# EAGLE board Alimentation (EAGLE 9.5.0)
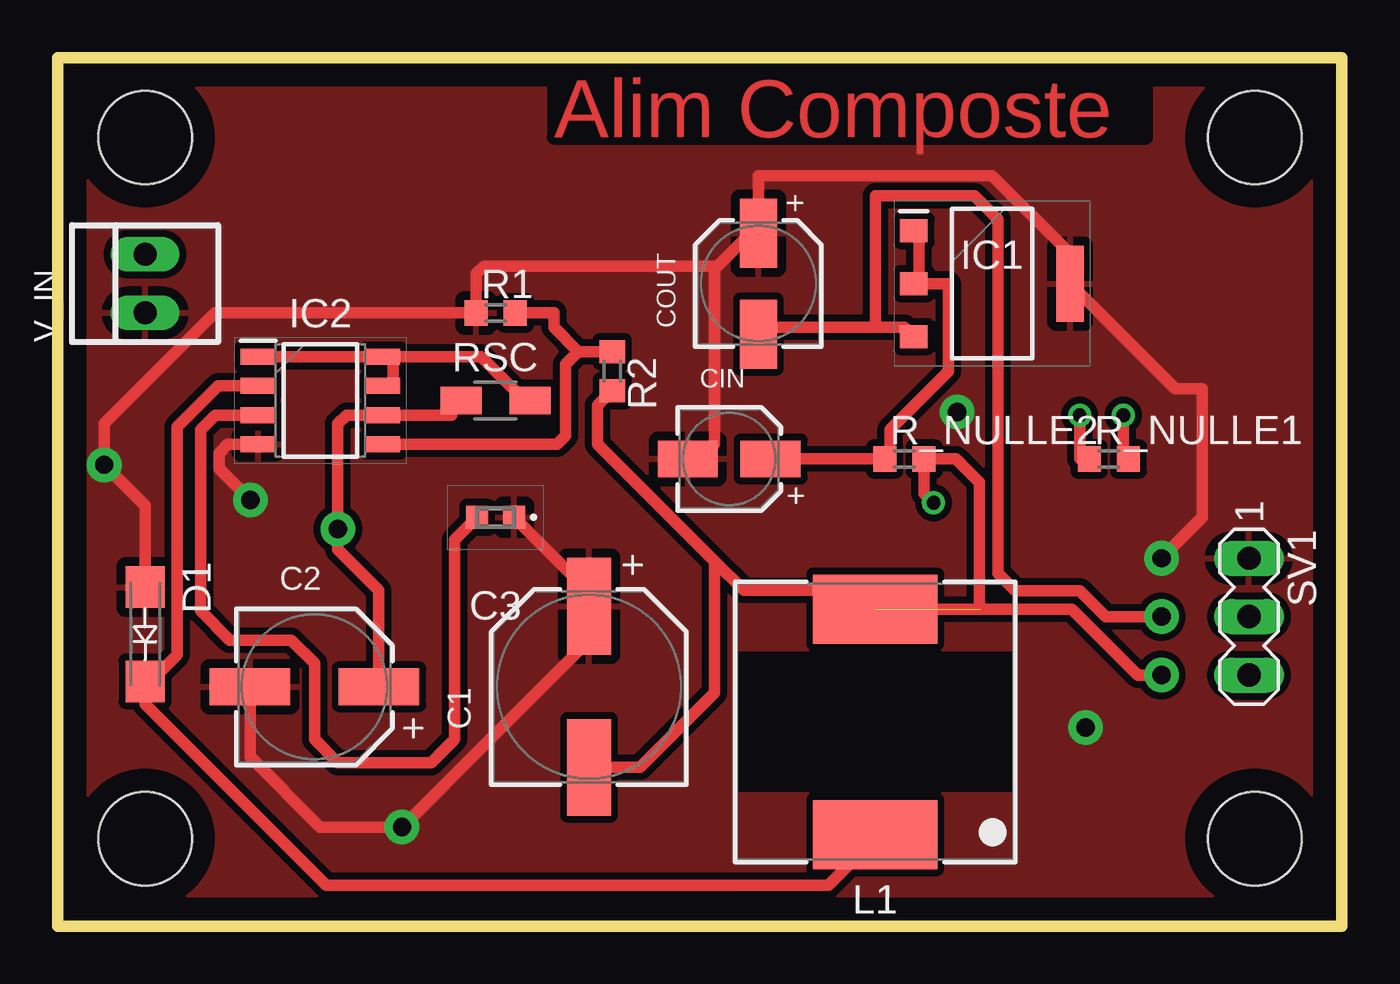
[diagram p0: board, top side]
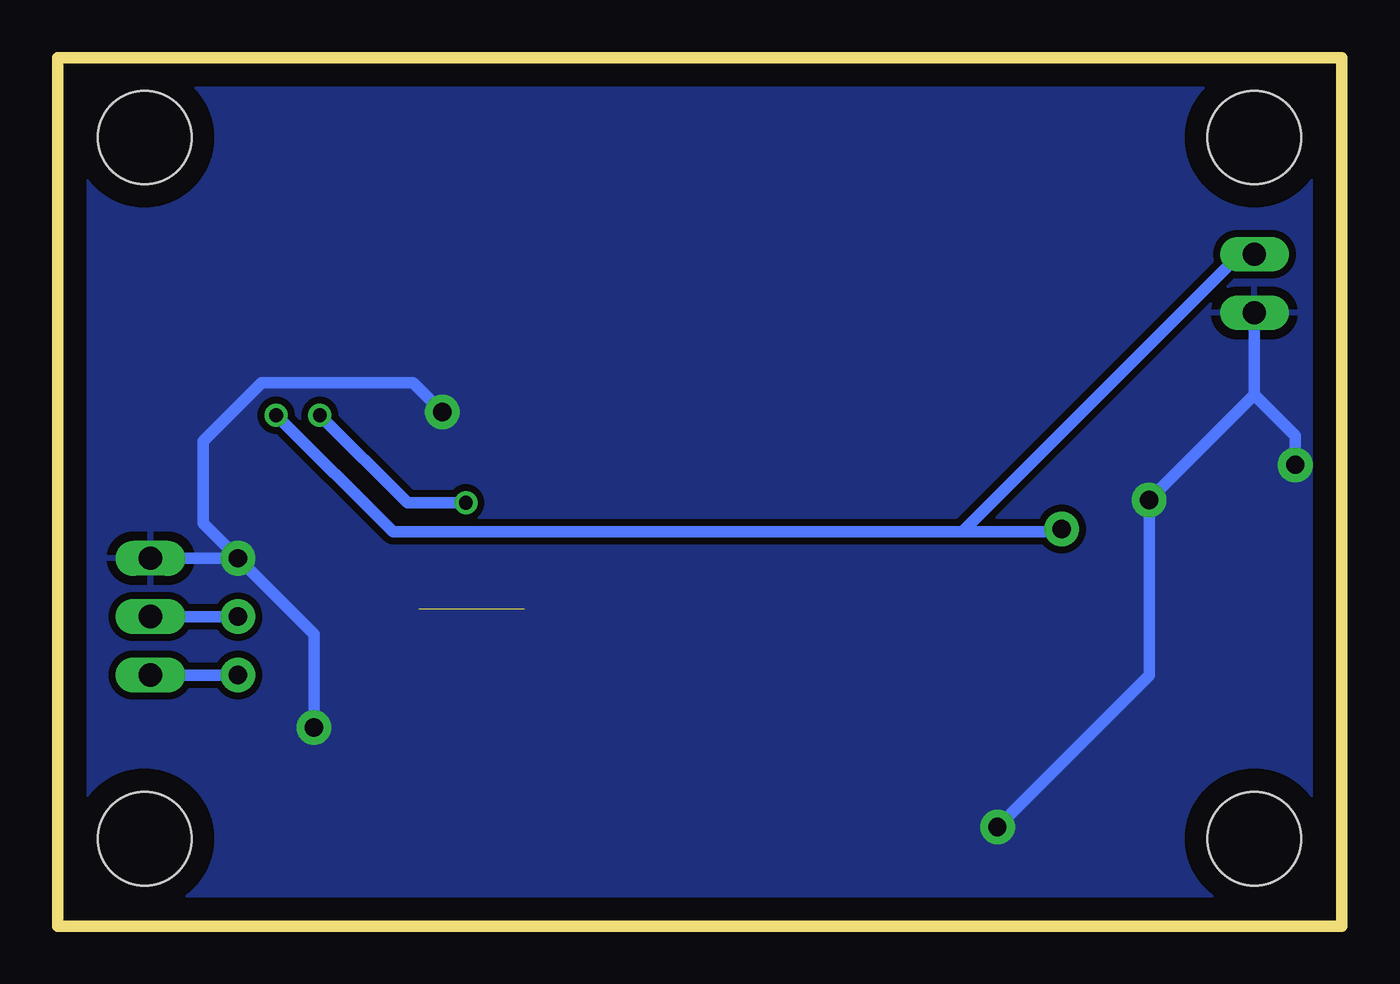
[diagram p1: board, bottom side, seen from below]

Size 55.86 x 37.77 mm. Coordinates in mm from the lower left corner, seen from the top.
Outline: 0,0 55.86,0 55.86,37.77 0,37.77 0,0
Copper layers (1*16): Top 0.035mm / dielectric 1.5mm / Bottom 0.035mm
Design rules "ENSEA_2022_04_08 *": minimum track width 0.2mm, minimum drill 0.6mm, track to track 0.3mm, track to pad 0.3mm, pad to pad 0.3mm, via to via 0.3mm, smd to smd 0.3mm, copper to edge 1mm, drill to drill 0.4mm, minimum pad ring 0.2mm, minimum via ring 0.2mm, stop-mask expansion 4mil, vias tented up to drill 0mil, thermal gap 0.4mm
Holes 4.06 mm at 52.07,3.81 52.07,34.29 3.81,34.29 3.81,3.81

## Footprints (pad centres in the part's own frame; a part is rotated, then mirrored left to right if it is on the bottom)
WCAP-ASLL_8X10.5(DXL) = smd 4.2 x 1.9: 1 3.5,0; 2 -3.5,0
WCAP-ASLL_6.3X7.7(DXL) = smd 3.5 x 1.6: 1 2.8,0; 2 -2.8,0
C0603 = smd 0.95 x 1: 1 -0.8,0; 2 0.8,0
WCAP-ASLL_4X5.5(DXL) = smd 2.6 x 1.6: 1 1.8,0; 2 -1.8,0
WCAP-ASLL_5X5.5(DXL) = smd 3 x 1.6: 1 2.2,0; 2 -2.2,0
SMA-DO214AC = smd 1.8 x 1.7: A -2.05,0; K 2.05,0
SOT230P700X175-4N = smd 1.2 x 1: 1 -3.4,2.3; 2 -3.4,0; 3 -3.4,-2.3 | smd 1.2 x 3.3: 4 3.4,0
SOIC127P600X175-8N = smd 1.525 x 0.7: 1 -2.712,1.905; 2 -2.712,0.635; 3 -2.712,-0.635; 4 -2.712,-1.905; 5 2.712,-1.905; 6 2.712,-0.635; 7 2.712,0.635; 8 2.712,1.905
WE-PDA_1260 = smd 5.4 x 3: 1 0,4.9; 2 0,-4.9
R0603 = smd 1 x 1.1: 1 -0.85,0; 2 0.85,0
R1206W = smd 1.8 x 1.2: 1 -1.499,0; 2 1.499,0
MA03-1 = drill 1.016 long: 1 -2.54,0; 2 0,0; 3 2.54,0
22-23-2021 = drill 1 long: 1 -1.27,0; 2 1.27,0

## Placement (x,y rotation side)
C1  470 µF  [WCAP-ASLL_8X10.5(DXL)]  23.11,10.41 90 top
C2  100 µF  [WCAP-ASLL_6.3X7.7(DXL)]  11.18,10.41 0 top
C3  C0603C471J5GACTU  [C0603]  19.05,17.78 180 top
CIN  10 µF  [WCAP-ASLL_4X5.5(DXL)]  29.21,20.32 0 top
COUT  22 µF  [WCAP-ASLL_5X5.5(DXL)]  30.48,27.94 90 top
D1  GF1  [SMA-DO214AC]  3.81,12.7 270 top
IC1  NCV33375ST3.3T3G  [SOT230P700X175-4N]  40.64,27.94 0 top
IC2  MC34063ACD-TR  [SOIC127P600X175-8N]  11.43,22.86 0 top
L1  220uH  [WE-PDA_1260]  35.56,8.89 180 top
R1  1.2k  [R0603]  19.05,26.67 0 top
R2  3.6k  [R0603]  24.13,24.13 270 top
R_NULLE1  0  [R0603]  45.72,20.32 0 top
R_NULLE2  0  [R0603]  36.83,20.32 0 top
RSC  0.3  [R1206W]  19.05,22.86 0 top
SV1  [MA03-1]  51.82,13.46 270 top
V_IN  22-23-2021  [22-23-2021]  3.81,27.94 90 top

## Library data of the parts
C1 = c1; DATASHEET-URL: https://www.we-online.com/catalog/datasheet/865060353009.pdf; DF: 16%; DIAMETER: 8mm; I-LEAK: 75.2uA; I-RIPPLE: 600mA; L: 10.5mm; OPERATING-TEMPERATURE: -55 °C up to +105 °C; PART-NUMBER: 865060353009; TECHNICAL-REFERENCE: ASEE105471M016DVCTEE000; VR: 16V(DC); Z: 0.17Ohm
C2 = c2; DATASHEET-URL: https://www.we-online.com/catalog/datasheet/865060445005.pdf; DF: 14%; DIAMETER: 6.3mm; I-LEAK: 25uA; I-RIPPLE: 300mA; L: 7.7mm; OPERATING-TEMPERATURE: -55 °C up to +105 °C; PART-NUMBER: 865060445005; TECHNICAL-REFERENCE: ASED077101M025DVCTCB000; VR: 25V(DC); Z: 0.36Ohm
C3 = c3; ARROW_PART_NUMBER: C0603C471J5GACTU; ARROW_PRICE-STOCK: https://www.arrow.com/en/products/c0603c471j5gactu/kemet-corporation?region=nac; DESCRIPTION: SMD Comm C0G, Ceramic, 470 pF, 5%, 50 VDC, 125 VDC, 125?C, -55?C, C0G, SMD, MLCC, Ultra-Stable, Low Loss, Class I, 0.1 % , 100 GOhms, 3.7 mg, 0603, 1.6mm, 0.8mm, 0.8mm, 0.7mm, 0.35mm, 4000, 78 Weeks, 120; HEIGHT: 0.87mm; MANUFACTURER_NAME: KEMET; MANUFACTURER_PART_NUMBER: C0603C471J5GACTU; MOUSER_PART_NUMBER: 80-C0603C471J5G; MOUSER_PRICE-STOCK: https://www.mouser.co.uk/ProductDetail/KEMET/C0603C471J5GACTU?qs=6Zy9Yzz7FWCvDjERNKhvPg%3D%3D
CIN = cin; DATASHEET-URL: https://www.we-online.com/catalog/datasheet/865060440001.pdf; DF: 14%; DIAMETER: 4mm; I-LEAK: 3uA; I-RIPPLE: 90mA; L: 5.5mm; OPERATING-TEMPERATURE: -55 °C up to +105 °C; PART-NUMBER: 865060440001; TECHNICAL-REFERENCE: ASEB055100M025DVCTAB000; VR: 25V(DC); Z: 1.35Ohm
COUT = cout; DATASHEET-URL: https://www.we-online.com/catalog/datasheet/865060442002.pdf; DF: 14%; DIAMETER: 5mm; I-LEAK: 5.5uA; I-RIPPLE: 150mA; L: 5.5mm; OPERATING-TEMPERATURE: -55 °C up to +105 °C; PART-NUMBER: 865060442002; TECHNICAL-REFERENCE: ASEC055220M025DVCTBB000; VR: 25V(DC); Z: 0.8Ohm
D1 = diode
IC1 = SamacSys_Parts; DESCRIPTION: ON SEMICONDUCTOR - NCV33375ST3.3T3G - Fixed LDO Voltage Regulator, 4.3V to 13V, 260mV Dropout, 3.3Vout, 300mAout, SOT-223-4; HEIGHT: 1.75mm; MANUFACTURER_NAME: onsemi; MANUFACTURER_PART_NUMBER: NCV33375ST3.3T3G; MOUSER_PART_NUMBER: 863-NCV33375ST3.3T3G; MOUSER_PRICE-STOCK: https://www.mouser.co.uk/ProductDetail/ON-Semiconductor/NCV33375ST33T3G?qs=Pqj8oIac8rWOl%252BM3OwXrOg%3D%3D
IC2 = SamacSys_Parts; DESCRIPTION: MC34063ACD-TR, DC-DC Controller, 40 V, 8-Pin, SOIC; HEIGHT: 1.75mm; MANUFACTURER_NAME: STMicroelectronics; MANUFACTURER_PART_NUMBER: MC34063ACD-TR; MOUSER_PART_NUMBER: 511-MC34063ACD-TR; MOUSER_PRICE-STOCK: https://www.mouser.co.uk/ProductDetail/STMicroelectronics/MC34063ACD-TR?qs=zDcCjb1ShEnlEhOFqqejBw%3D%3D
L1 = l; DATASHEET-URL: https://www.we-online.com/catalog/datasheet/784771221.pdf; FRES: 3.9MHz; IR: 0.99A; ISAT: 1.1A; MOUNT: SMT; PART-NUMBER: 784771221; RDC-MAX: 348mOhm; RDC-TYP: 290mOhm
R1 R2 R_NULLE1 R_NULLE2 RSC = rcl; SPICEPREFIX: R
SV1 = con-lstb; OC_FARNELL: unknown; OC_NEWARK: unknown
V_IN = con-molex; MF: MOLEX; MPN: 22-23-2021; OC_FARNELL: 1462926; OC_NEWARK: 25C3832

## Nets
GND: C1.1 C2.2 C3.1 CIN.2 COUT.1 D1.A IC1.4 IC2.4 R1.1 SV1.1 V_IN.1
N$1: IC2.5 R1.2 R2.1
N$2: IC2.1 IC2.7 IC2.8 RSC.2
N$3: C2.1 IC2.6 R_NULLE1.2 RSC.1 V_IN.2
N$6: D1.K IC2.2 L1.1
N$7: C3.2 IC2.3
N$10: CIN.1 IC1.1 IC1.2 R_NULLE2.1
VCC_3V: COUT.2 IC1.3 SV1.2
VCC_5V: C1.2 L1.2 R2.2 R_NULLE1.1 R_NULLE2.2 SV1.3

## Tracks (layer width: path | path; a pad name or v marks a point on that pad's centre or on a via)
GND  (via drill 0.8 pad 1.5)
  Top 0.5: C3.1 23.11,14.52 C1.1 23.11,12.45 v14.99,4.32 11.43,4.32 8.38,7.37 C2.2 | 30.48,30.48 28.7,28.7 | 28.7,28.7 28.57,28.57 28.57,20.95 27.94,20.32 CIN.2 | 30.48,30.48 30.48,32.64 40.64,32.64 44.04,29.24 IC1.4 48.61,23.37 49.78,23.37 49.78,17.78 v48.01,16 | 30.48,30.48 COUT.1 | IC2.4 7.4,20.95 7.02,20.57 7.02,19.9 v8.38,18.54 | D1.A 3.81,18.29 v2.03,20.07 2.03,21.84 6.86,26.67 R1.1 18.2,28.36 18.54,28.7 28.7,28.7
  Bottom 0.5: SV1.1 v48.01,16 | 3.81,23.11 v8.38,18.54 8.38,10.92 v14.99,4.32 | 3.81,23.11 V_IN.1 | 3.81,23.11 2.03,21.34 v2.03,20.07 | v44.7,8.64 44.7,12.7 v48.01,16 | v39.12,22.35 40.39,23.62 46.99,23.62 49.53,21.08 49.53,17.53 v48.01,16
  pour Top: -5.08,-3.3 60.2,-3.3 60.2,44.7 -5.08,44.7
  pour Bottom: -5.08,-3.3 59.69,-3.3 59.69,44.2 -5.08,44.2
N$1
  Top 0.5: R1.2 21.59,26.67 21.59,26.04 22.64,24.98 | R2.1 22.64,24.98 | IC2.5 21.72,20.95 22.1,21.34 22.1,24.43 22.64,24.98
N$2
  Top 0.5: IC2.1 IC2.8 14.61,24.77 | 14.61,24.77 14.61,23.49 IC2.7 | 14.61,24.77 18.41,24.77 20.32,22.86 RSC.2
N$3  (via drill 0.6, 0.8 pad 1.5)
  Top 0.5: RSC.1 17.14,22.86 17.14,22.22 IC2.6 12.57,22.22 12.19,21.84 v12.19,17.27 12.19,16.38 13.97,14.61 C2.1 | v46.36,22.22 46.36,20.32 R_NULLE1.2
  Bottom 0.5: v46.36,22.22 41.28,17.14 16.51,17.14 | 4.06,29.21 V_IN.2 4.45,29.21 16.51,17.14 | v12.19,17.27 12.32,17.14 16.51,17.14
N$6
  Top 0.5: L1.1 35.56,3.81 33.53,1.78 11.68,1.78 3.81,9.65 D1.K 4.05,10.65 5.21,11.81 5.21,21.72 6.98,23.49 IC2.2
N$7
  Top 0.5: IC2.3 6.86,22.22 6.22,21.59 6.22,13.72 7.49,12.45 10.16,12.45 11.18,11.43 11.18,8.13 12.19,7.11 16.26,7.11 17.27,8.13 17.27,16.8 C3.2
N$10
  Top 0.5: 37.47,27.94 37.47,29.84 IC1.1 | CIN.1 R_NULLE2.1 36.2,20.32 36.2,21.59 38.74,24.13 38.74,27.94 37.47,27.94 | 37.47,27.94 IC1.2
VCC_3V  (via drill 0.8 pad 1.5)
  Top 0.5: 35.56,26.04 30.48,26.04 COUT.2 | 35.56,26.04 36.83,26.04 IC1.3 | 35.56,26.04 35.56,31.75 39.88,31.75 40.89,30.73 40.89,15.35 41.66,14.59 44.45,14.59 45.58,13.46 v48.01,13.46
  Bottom 0.5: v48.01,13.46 SV1.2
VCC_5V  (via drill 0.6, 0.8 pad 1.5)  (1 unrouted)
  Top 0.5: 28.57,15.88 29.84,14.61 35.56,14.61 L1.2 | 28.57,15.88 23.5,20.95 23.5,22.64 R2.2 | 37.47,20.32 R_NULLE2.2 | 35.56,13.34 L1.2 | v44.45,22.22 44.45,20.32 R_NULLE1.1 | 28.57,15.88 28.57,10.16 25.33,6.91 C1.2 | L1.2 40.09,13.79 40.09,19.3 39.08,20.32 R_NULLE2.2 | 40.13,13.79 44.12,13.79 46.99,10.92 v48.01,10.92 | v38.1,18.41 37.68,18.84 R_NULLE2.2
  Bottom 0.5: v44.45,22.22 40.64,18.41 v38.1,18.41 | v48.01,10.92 SV1.3

## Text on the board
Top: Alim Composte